# Altium PCB Digital.PcbDoc
Units mil, origin at the board's own origin, x right, y up, seen from the top; angles counter-clockwise.
Board outline 4470 x 2420 mil, 2 copper layers (Top Layer, Bottom Layer); 22 components, 58 nets, 187 pads, 9 vias.
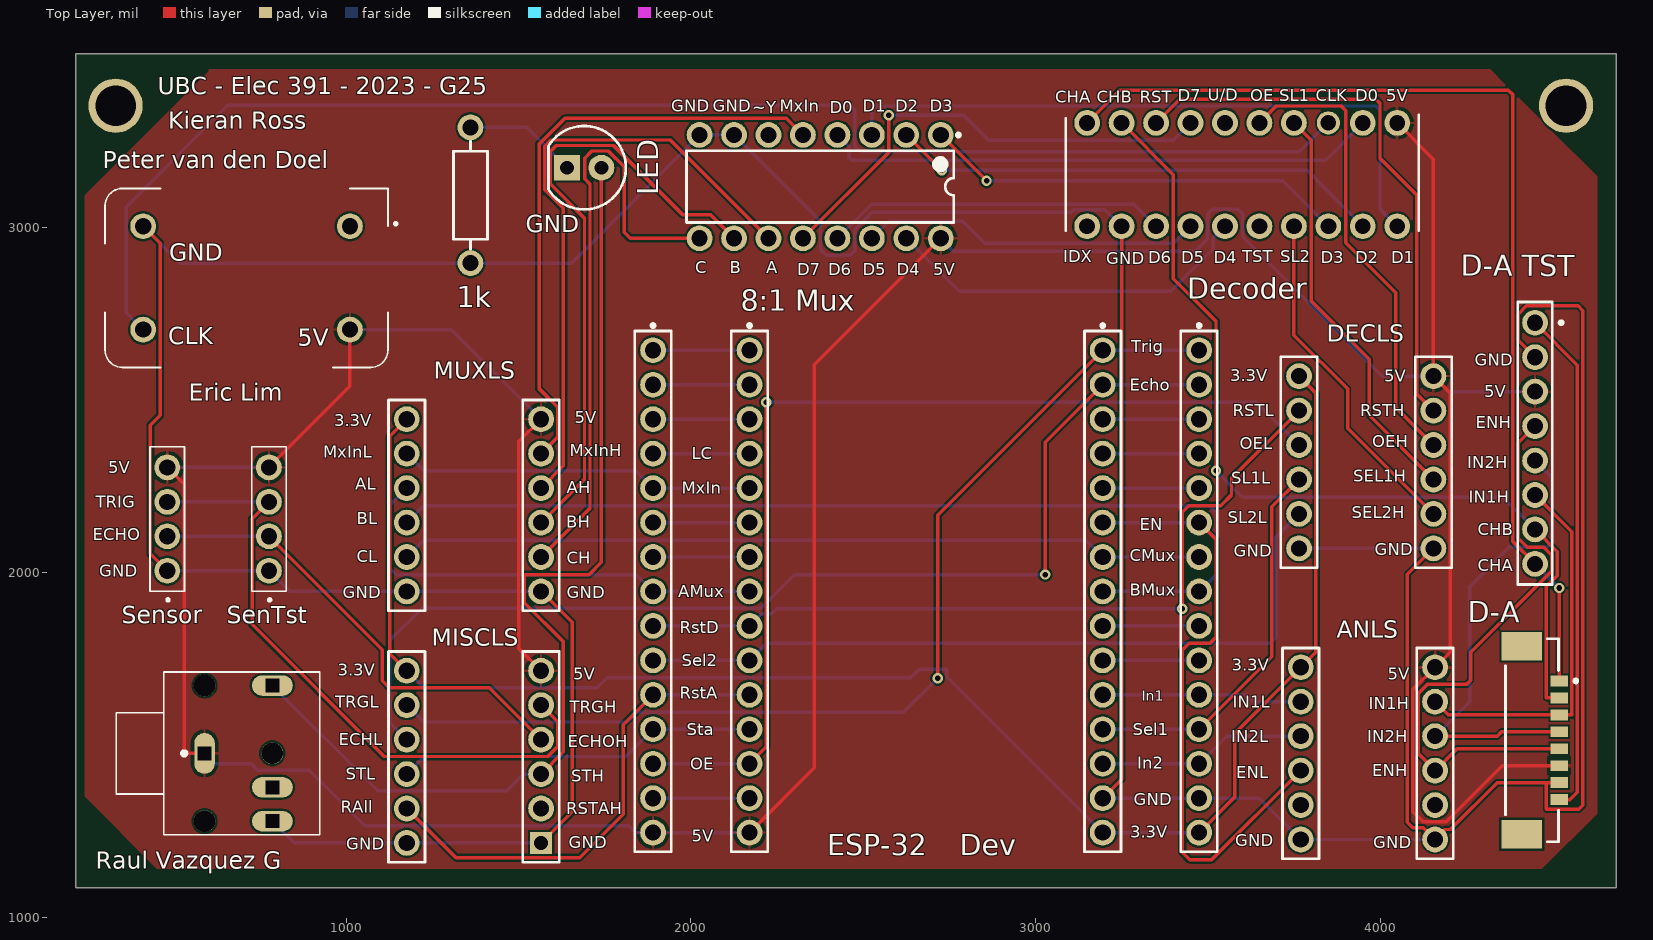
[diagram p0: Top Layer view]
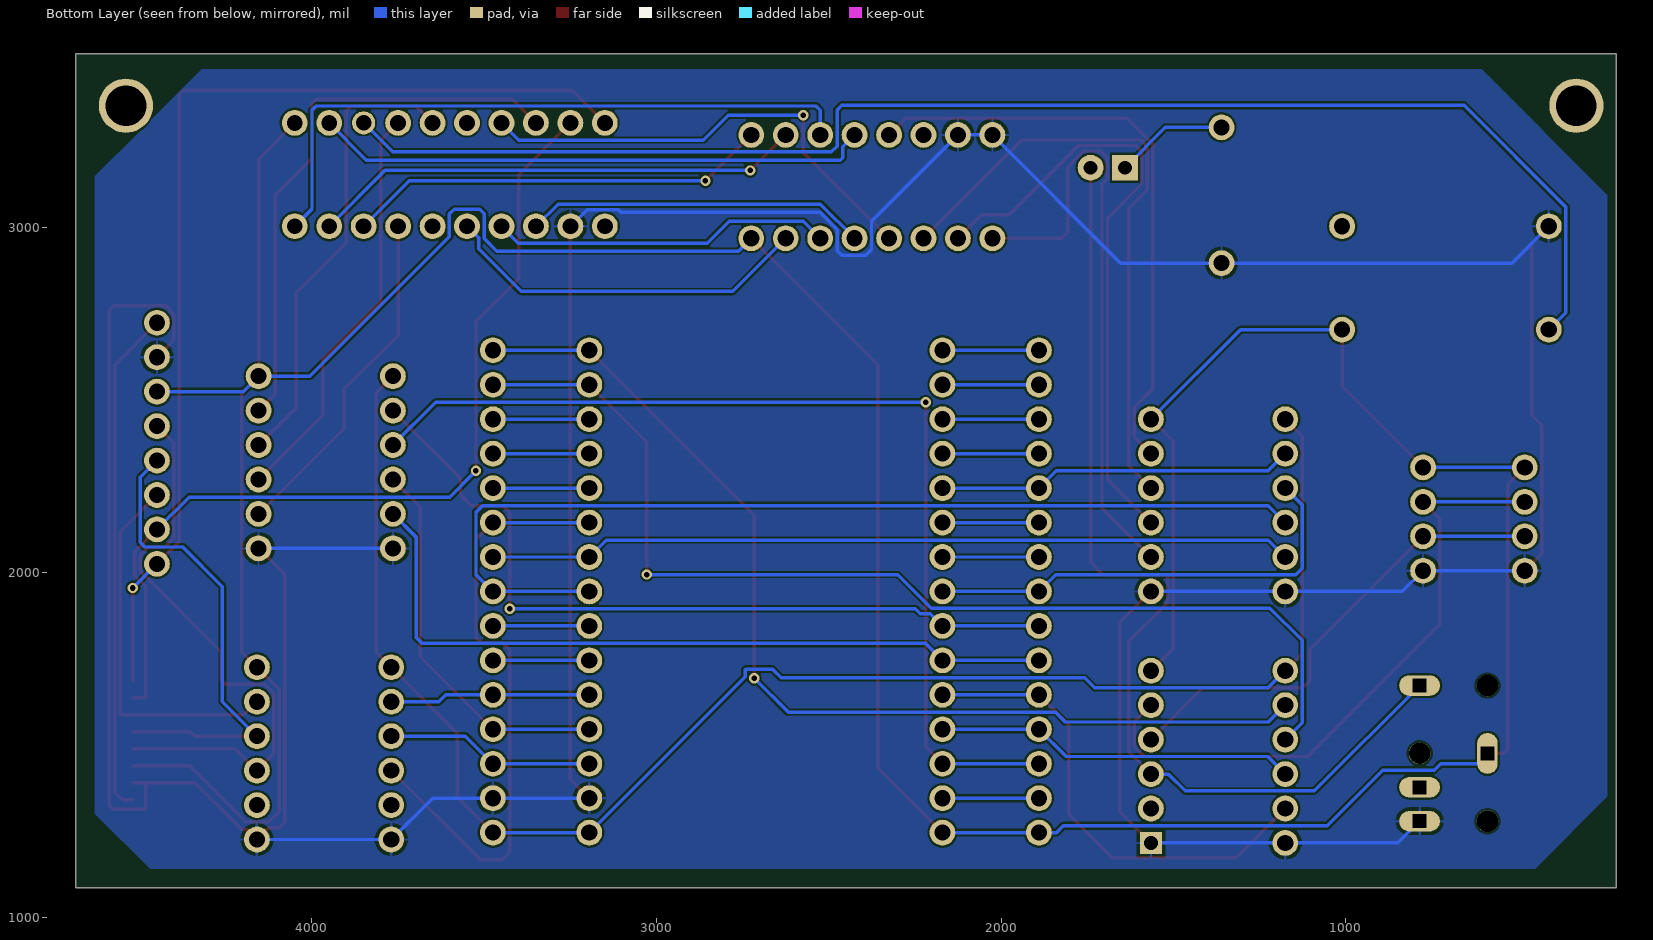
[diagram p1: Bottom Layer view, seen from below]
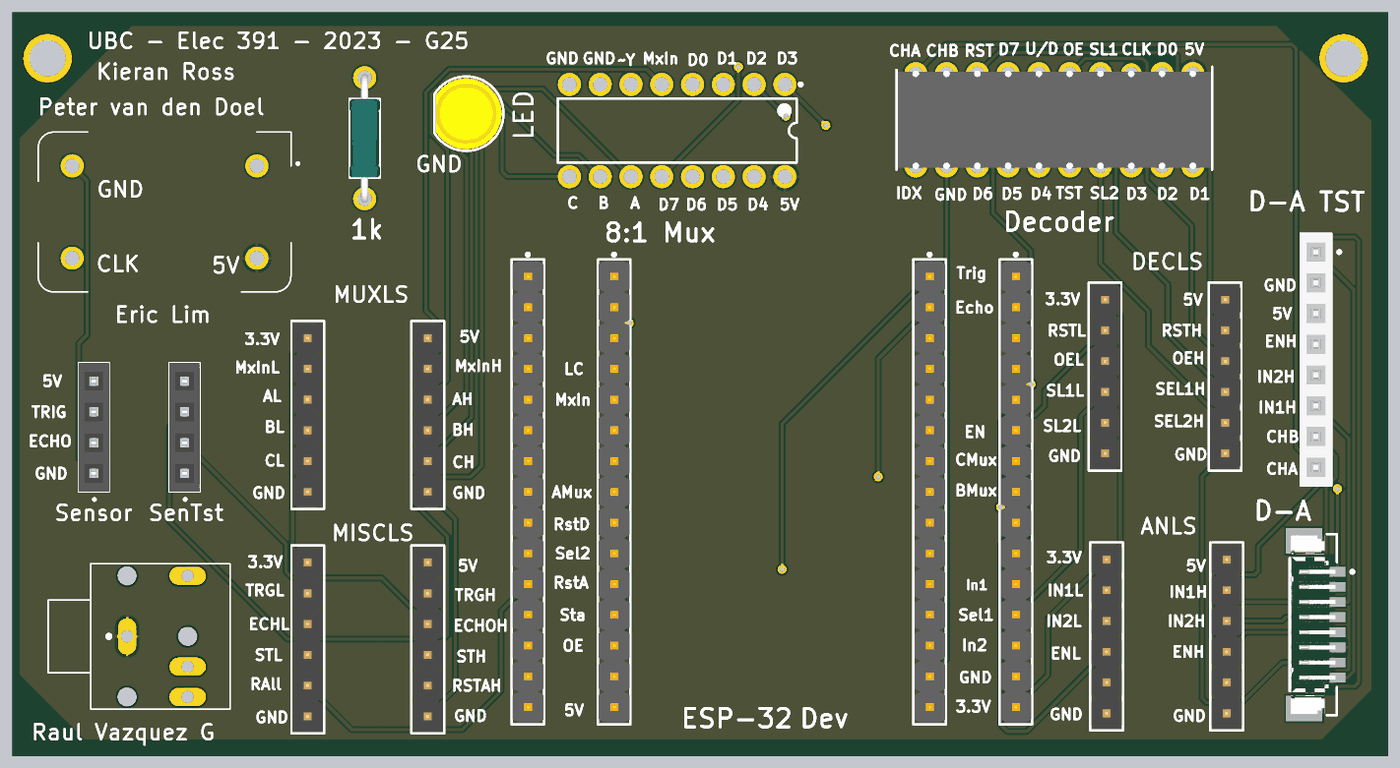
[diagram p2: 3D render of the assembled board from above, using the file's embedded part models]

## Layer stack, top to bottom
Top Solder: solder mask 0.4, Solder Resist, Dk 3.5
Top Layer: signal copper 1.4
Dielectric 1: dielectric 12.6, FR-4, Dk 4.8
Bottom Layer: signal copper 1.4
Bottom Solder: solder mask 0.4, Solder Resist, Dk 3.5

## Board outline
215,1085 4685,1085 4685,3505 215,3505

## Design rules (kind name [scope] priority, off if disabled: settings)
Clearance "Clearance~Sunstone Circuits" [All] p1: gap=6 ignorepadtopadclearanceinfootprint=FALSE except(0: Arc-Hole Track-Hole SMDPad-Hole THPad-Hole Via-Hole Fill-Hole Poly-Hole Region-Hole Text-Hole) // Sunstone Circuits Minimum Clearance Rule (Double Sided)
HoleSize "HoleSize~Sunstone Circuits" [All] p1: absolutevalues=TRUE maxlimit=251 minlimit=16 maxpercent=80.000 minpercent=20.000 // SSC Hole Size Rule For Single Sided & Double Sided Designs.
HoleSize Testpoint [All] p2: absolutevalues=TRUE maxlimit=100 minlimit=1 maxpercent=80.000 minpercent=20.000
HoleSize TestPointUsage [All] p3: absolutevalues=TRUE maxlimit=100 minlimit=1 maxpercent=80.000 minpercent=20.000
MinimumAnnularRing "MinimumAnnularRing~Sunstone Circuits" [All] p1: minimumring=7 // Sunstone Circuits Minimum Annular Ring (Double Sided)
PlaneClearance "PlaneClearance~Sunstone Circuits" [All] p1: clearance=12 // Sunstone Circuits Power Plane Clearance Rule (Double Sided)
PlaneConnect "PlaneConnect~Sunstone Circuits" [All] p1: planeconnectstyle=Relief reliefexpansion=10 reliefentries=4 reliefconductorwidth=8 reliefairgap=10 // Sunstone Circuits Power Plane Connect Rule (Double Sided)
PolygonConnect "PolygonConnect~Sunstone Circuits" [All] p1: connectstyle=Relief reliefconductorwidth=8 reliefentries=4 polygonreliefangle="90 Angle" airgapwidth=10 // Sunstone Circuits Polygon Connect Style (Double Sided)
RoutingVias "RoutingVias~Sunstone Circuits" [All] p1: holewidth=16 width=30 viastyle="Through Hole" minholewidth=16 minwidth=30 maxholewidth=20 maxwidth=40 // Sunstone Circuits Routing Vias Rule (Double Sided)
ShortCircuit "ShortCircuit~Sunstone Circuits" [All] p1: allowed=FALSE // Sunstone Circuits Short Circuit Rule~Do Not Allow (Double Sided)
SolderMaskExpansion "SolderMaskExpansion~Sunstone Circuits" [All] p1: expansion=3 istentingtop=FALSE // Sunstone Circuits Solder Mask Expansion Rule (Double Sided)
ViasUnderSMD "ViasUnderSMD~Sunstone Circuits" [All] p1: allowed=FALSE // Sunstone Circuits Vias Under SMD~Do Not Allow (Double Sided)
Width "Width~Sunstone Circuits" [All] p1: maxlimit=100 minlimit=6 preferedwidth=10 // Sunstone Circuits Minimum Width Rule (Double Sided)
26 further rules are at their usual default settings.

## Classes and differential pairs
component class pcb_schematic_digital: 1k "8:1 Mux" Decoder Dev ESP-32 LED "Ultasonic Sensor Conn Header"

## Components (designator, comment, footprint, x,y, rotation, side; value= is the part's Value field where it differs from the comment)
1k "MRS25000C1001FCT00" FP-MRS25-MFG 1360,3095 r90 top (schematic designator "1k res")
"8:1 Mux" "SN74HC151N" N0016A 2375,3120 r270 top
"Audio Jack" "SJ1-3544N" CUI_SJ1-3544N 588.15,1475 r0 top
Crystal "ECS-100AX-100" OSC_ECS-100AX-100 710,2855 r180 top
D-A "53398-0871" FP-53398-0871-MFG 4441.26,1513.03 r90 top (schematic designator "Digital to Analog Conn Header")
"D-A TST" "PPPC081LFBN-RC" SLIN-PPPC081LFBN-RC_V 4450,2375 r270 top (schematic designator "Test Pin DAC")
Decoder "HCTL-2022" DIP762W56P254L2591H330Q20N 3600,3155 r270 top (schematic designator Encoder)
Dev "61301511121" FP-61301511121-MFG 3195,1945 r270 top (schematic designator "ESP RIGHT TEST")
"ESP LEFT HEADER" "61301511121" FP-61301511121-MFG 1890,1945 r270 top
"ESP RIGHT HEADER" "61301511121" FP-61301511121-MFG 3475,1945 r270 top
ESP-32 "61301511121" FP-61301511121-MFG 2170,1945 r270 top (schematic designator "ESP LEFT TEST")
LED "SSL-LX5093YD" FP-SSL-LX5093YD-MFG 1690,3175 r0 top (schematic designator diode)
LS1-H "61300611121" 61300611121#1 4160,1475 r90 top
LS1-L "61300611121" 61300611121#1 3770,1475 r270 top
LS2-H "61300611121" 61300611121#1 1565,2195 r90 top
LS2-L "61300611121" 61300611121#1 1175,2195 r270 top
LS3-H "61300611121" 61300611121#1 4155,2320 r90 top
LS3-L "61300611121" 61300611121#1 3765,2320 r270 top
LS4-H "61300611121" 61300611121#2 1565,1465 r90 top
LS4-L "61300611121" 61300611121#1 1175,1465 r270 top
"Test Pin Sensor" "PPTC041LFBN-RC" SULLINS_PPTC041LFBN-RC 480,2155.05 r90 top
"Ultrasonic Sensor Header" "PPTC041LFBN-RC" SULLINS_PPTC041LFBN-RC 775,2155.05 r90 top

## Footprints (in the part's own frame and the unit in brackets; to place one, negate y for a bottom-side part, rotate by r counter-clockwise, add the part's x,y. Pads: shape width x height; smd on the part's side, far side on the other; paste and mask are expansions set on the pad)
61300611121#1 [mm] "Pin Header, pitch 2.54 mm, THT, Vertical, single row, 6p"
  round 1.9 hole 1.194 paste-1000 mask+0: 1(-6.35,0) 2(-3.81,0) 3(-1.27,0) 4(1.27,0) 5(3.81,0) 6(6.35,0)
  silkscreen extent -7.77,-1.34 7.77,1.34, body extent -7.62,-1.27 7.62,1.27, height 8.57
61300611121#2 [mm] "Pin Header, pitch 2.54 mm, THT, Vertical, single row, 6p"
  rect 1.6x1.6 hole 1.016: 1(-6.35,0)
  round 1.9 hole 1.194 paste-1000 mask+0: 2(-3.81,0) 3(-1.27,0) 4(1.27,0) 5(3.81,0) 6(6.35,0)
  silkscreen extent -7.77,-1.34 7.77,1.34, body extent -7.62,-1.27 7.62,1.27, height 8.57
CUI_SJ1-3544N [mm]
  oval 1.508x3.016 hole 1 square: 1(0,0)
  oval 3.016x1.508 hole 1 square: 2(5,-5) 3(5,5) 4(5,-2.5)
  round 1.6 hole 1.6 unplated: ""(0,-5) ""(0,5) ""(5,0)
  silkscreen extent -6.5,-6 8.5,6
DIP762W56P254L2591H330Q20N [mm]
  round 1.9 hole 1.168 paste-1000 mask+0: 1(-3.81,11.43) 2(-3.81,8.89) 4(-3.81,3.81) 5(-3.81,1.27) 6(-3.81,-1.27) 7(-3.81,-3.81) 8(-3.81,-6.35) 9(-3.81,-8.89) 10(-3.81,-11.43) 11(3.81,-11.43) 12(3.81,-8.89) 13(3.81,-6.35) 14(3.81,-3.81) 15(3.81,-1.27) 16(3.81,1.27) 17(3.81,3.81) 18(3.81,6.35) 19(3.81,8.89) 20(3.81,11.43)
  round 1.7 hole 1.143 paste-1000 mask+0: 3(-3.81,6.35)
  silkscreen extent -4.39,-13.02 4.13,13.02, body extent -4.09,-12.95 4.09,12.95, height 2.31
FP-53398-0871-MFG [mm]
  rect 0.8x1.3 smd paste+0 mask+0: 1(4.375,-2) 2(3.125,-2) 3(1.875,-2) 4(0.625,-2) 5(-0.625,-2) 6(-1.875,-2) 7(-3.125,-2) 8(-4.375,-2)
  rect 2.1x3 smd paste+0 mask+0: 9(-6.925,0.75) 10(6.925,0.75)
  silkscreen extent -7.48,-3.35 7.48,1.95, body extent -8.08,-2.75 8.08,2.35, height 0.25
FP-61301511121-MFG [mm]
  round 1.9 hole 1.194 paste-1000 mask+0: 1(-17.78,0) 2(-15.24,0) 3(-12.7,0) 4(-10.16,0) 5(-7.62,0) 6(-5.08,0) 7(-2.54,0) 8(0,0) 9(2.54,0) 10(5.08,0) 11(7.62,0) 12(10.16,0) 13(12.7,0) 14(15.24,0) 15(17.78,0)
  silkscreen extent -19.72,-1.34 19.2,1.34, body extent -19.3,-1.45 19.3,1.45, height 0.25
FP-MRS25-MFG [mm]
  round 1.9 hole 1.194 paste-1000 mask+0: 1(-5,0) 2(5,0)
  silkscreen extent -3.97,-1.25 3.97,1.25, body extent -5.72,-1.35 5.72,1.35, height 0.25
FP-SSL-LX5093YD-MFG [mm]
  rect 1.9x1.9 hole 1.016 paste-1000 mask+0: 1(-1.27,0)
  round 1.9 hole 1.016 paste-1000 mask+0: 2(1.27,0)
  silkscreen extent -2.62,-3.07 3.07,3.07, body extent -3.17,-3.17 3.17,3.17, height 0.25
N0016A [mm] "DIP, 16-Leads, Body 19.7x6.6mm, Pitch 2.54mm"
  round 1.9 hole 1.194 paste-1000 mask+0: 1(-3.81,8.89) 2(-3.81,6.35) 3(-3.81,3.81) 4(-3.81,1.27) 5(-3.81,-1.27) 6(-3.81,-3.81) 7(-3.81,-6.35) 8(-3.81,-8.89) 9(3.81,-8.89) 10(3.81,-6.35) 11(3.81,-3.81) 12(3.81,-1.27) 13(3.81,1.27) 14(3.81,3.81) 15(3.81,6.35) 16(3.81,8.89)
  silkscreen extent -3.93,-9.85 2.65,10.32, body extent -3.95,-9.85 3.95,9.85, height 5.08
OSC_ECS-100AX-100 [mm]
  round 1.9 hole 1.194 paste-1000 mask+0: 1(-7.62,-3.81) 7(7.62,-3.81) 8(7.62,3.81) 14(-7.62,3.81)
  silkscreen extent -11.1,-6.6 10.43,6.6
SLIN-PPPC081LFBN-RC_V [mm] "THD, 8-Leads, Body 20.82x2.54mm, Pitch 2.54mm"
  round 1.9 hole 1.194 paste-1000 mask+0: 1(-8.89,0) 2(-6.35,0) 3(-3.81,0) 4(-1.27,0) 5(1.27,0) 6(3.81,0) 7(6.35,0) 8(8.89,0)
  silkscreen extent -10.41,-1.27 10.41,2.05, body extent -10.41,-1.27 10.41,1.27, height 8.5
SULLINS_PPTC041LFBN-RC [mm]
  round 1.9 hole 1.194 paste-1000 mask+0: 1(-3.81,0) 2(-1.27,0) 3(1.27,0) 4(3.81,0)
  silkscreen extent -6.06,-1.27 5.33,1.27, body extent -5.33,-1.27 5.33,1.27, height 8.51

## Part data
1k: library part CMP-02408-000051-1, "RES 1K OHM 0.6W 1% AXIAL", Case/Package=Axial, Max Operating Temperature=155°C, Max Power Dissipation=600mW, Min Operating Temperature=-55°C, Package Quantity=5000, Resistance=1kR, Resistance Tolerance=1%, Resistor Type="Metal Film", Temperature Coefficient=50ppm/°C, Voltage Rating=350V, Construction=Cylindrical, Contact Plating=Tin, Diameter=2.5mm, Lead Diameter=0.6mm, Lead Free="Lead Free", Length=6.5mm, Military Standard=Not, Mount="Through Hole", Number of Pins=2, Number of Terminations=2, Packaging="Tape and Reel", Power Rating=600mW, Radiation Hardening=No, RoHS Compliant=Yes, Series=MRS25, Technology="THIN FILM", Termination=Axial, Tolerance=1%, Voltage Rating (DC)=350V, Weight=0.00776oz, Width=2.5mm
"8:1 Mux": library part CMP-1628-00023-2, "8-Line To 1-Line Data Selectors/Multiplexers, N0016A, TUBE", F @ Nom Voltage(Max)(Mhz)=28, Generic Part Number=SN74HC151, ICC @ Nom Voltage(Max)(mA)=0.08, Manufacturer="Texas Instruments", Operating Temperature Range(C)="-40 to 85", Rating=Catalog, tpd @ Nom Voltage(Max)(ns)=63, Voltage(Nom)(V)=3.3,5, Bits(#)=8, Channels(#)=1, Code_JEDEC=MS-001, Configuration=8：1, DatasheetVersion=SCLS110E, Function=Encoder/Multiplexer, Input Type=LVTTL/CMOS, Output Drive (IOL/IOH)(Max)(mA)=7.8/-7.8, Output Type=CMOS, PackageReference=N0016A, Schmitt Trigger=No, Technology Family=HC, Type=Standard, VCC(Max)(V)=6, VCC(Min)(V)=2
"Audio Jack": "3.5 mm Right-Angle Stereo Jack, 4 Pin PCB Mount, Non-Threaded", Package=None, Availability=Unavailable, MP=SJ1-3544N, Price=None
Crystal: "Oscillator  14-DIP, 4 Leads (Full Size, Metal Can)", Package=None, Availability=Unavailable, MP=ECS-100AX-100, Price=None
D-A: library part CMP-04776-000009-1, "CONN HEADER SMD 8POS 1.25MM", Ambient Temperature Range High=+105°C, Ambient Temperature Range Low=-40°C, Current Rating=1A, Manufacturer=Molex, Package=0, Temperature="-40°C to +105°C", Voltage Rating=125V, Automotive=No, Category=Conn, ComponentLink2Description=Datasheet, ComponentLink2URL=https://www.molex.com/pdm_docs/ps/PS-51021-024-001.pdf, Conn Gender=Male, Conn Orientation=Vertical, Contact Material=Tin,Nickel, Device Class L1=Connectors, Device Class L2="Headers and Wire Housings", Device Class L3=unset, Digikey Description="CONN HEADER SMD 8POS 1.25MM", Footprint Url=https://www.molex.com/pdm_docs/sd/533980871_sd.pdf, Height=4.9mm, Lead Free=Yes, Manufacturer Part Number=53398-0871, Mouser Description="Headers & Wire Housings VERTICAL HDR SMT 8P", Number Of Contacts=8, Number Of Rows=1, Octopart=https://octopart.com/53398-0871-molex-655298, Pitch=1.25mm, RoHS=TRUE, Standoff Height=0.05mm, Temperature Range High=+105°C, Temperature Range Low=-40°C
"D-A TST": library part CMP-1770-00002-1, "Female Header, Pitch 2.54 mm, 1 x 8 Position, Height 8.5 mm, Tail Length 3.2 mm, -40 to 105 degC, RoHS, Bulk", Case\Package=TO-252-3, Input Capacitance="350 pF", Max Operating Temperature="150 degC", Max Power Dissipation="2.5 W", Min Operating Temperature="-55 degC", Package Quantity=2500, ComponentLink1Description=Datasheet, ComponentLink1URL=http://sullinscorp.com/catalogs/101_PAGE114-115_.100_FEMALE_HDR.pdf, DatasheetVersion=Jan-15, Elements=1, Height="2.39 mm", Length="6.73 mm", Mount="Surface Mount", PackageDescription="Female Header, Pitch 2.54 mm, 1 x 8 Position, Height 8.5 mm, Tail Length 3.2 mm", PackageReference=PPPC081LFBN-RC, Packaging="Tape and Reel", Pins=3, Radiation Hardening=No, Rds On Max="115 mohm", REACH SVHC="No SVHC", RoHSCompliant=true, Typical Rise Time="90 ns", Width="6.22 mm"
Decoder: "HCTL-2022 quadrature decoder/counter ic Avago Technologies HCTL-2022 Decoder, 20-Pin PDIP", Manufacturer_Name="Avago Technologies", Mouser Part Number=630-HCTL-2022, Datasheet Link=https://datasheet.datasheetarchive.com/originals/distributors/Datasheets-2/DSA-25498.pdf, Geometry.Height=3.302mm, Manufacturer_Part_Number=HCTL-2022, Mouser Price/Stock=https://www.mouser.com/Search/Refine.aspx?Keyword=630-HCTL-2022
Dev "ESP LEFT HEADER" "ESP RIGHT HEADER" ESP-32: library part CMP-207987-000006-1, "CONN HEADER VERT 15POS 2.54MM", Color=Black, Flammability Rating="UL94 V-0", Max Operating Temperature=105°C, Min Operating Temperature=-40°C, Voltage Rating=250V, Connector Type=Header, Contact Finish - Mating=GOLD, Contact Material="Copper Alloy", Contact Mating Length=0.236inch, Contact Plating=Gold, Contact Shape=Square, Contact Type="Male Pin", Fastening Type=Pull, Gender=Male, Insulation Color=Black, Insulation Material=Nylon, Mount="Through Hole", Number Of Contacts=15, Number of Positions=15, Number Of Rows=1, Packaging=Bulk, Pitch=0.1inch, RoHS Compliant=Yes, Series=WR-PHD, Termination=Solder
LED: library part CMP-57192-000007-1, "LED YELLOW DIFFUSED T-1 3/4 T/H", Case/Package=Radial, Color=Yellow, Forward Current=20mA, Forward Voltage=2.1V, Max Operating Temperature=85°C, Min Operating Temperature=-40°C, Package Quantity=1000, Diameter=5mm, Dominant Wavelength=568nm, Height=8.6mm, Illumination Color=Yellow, Lead Free="Lead Free", Length=0.5inch, Lens Color=Yellow, Lens Style=Dome, Lens Transparency=Diffused, Luminous Intensity=30mcd, Mount="Through Hole", Number of LEDs=1, Number of Pins=2, Packaging=Bulk, REACH SVHC="No SVHC", RoHS Compliant=Yes, Series=-, Test Current=20mA, Viewing Angle=60°, Wavelength=585nm, Weight=0.01lb, Width=1.5inch
LS1-H LS1-L LS2-H LS2-L LS3-H LS3-L LS4-H LS4-L: library part CMP-1502-01070-1, "THT Vertical Pin Header WR-PHD, Pitch 2.54 mm, Single Row, 6 pins", Contact Resistance=20mOhm, Manufacturer="Wurth Elektronik", Operating Temperature=-40to105degC, Rated Current=3A, Withstanding Voltage=500VAC, Working Voltage=250VAC, Datasheet URL=https://katalog.we-online.de/em/datasheet/6130xx11121.pdf, Gender=Male, Manufacturer URL=http://www.we-online.de, Mounting Technology=THT, Orientation=Vertical, Package Reference=61300611121, Packaging=Bag, Part Number=61300611121, Pin Number=6, Pitch=2.54mm, Publisher=WurthElektronik, Row Number=Single
"Test Pin Sensor" "Ultrasonic Sensor Header": "4 Position Header Connector 0.100 (2.54mm) Through Hole Tin", Package=None, Check_prices=https://www.snapeda.com/parts/PPTC041LFBN-RC/Sullins+Connector+Solutions/view-part/?ref=eda, Digi-Key_Part_Number=S7002-ND, MF="Sullins Connector", MP=PPTC041LFBN-RC, Purchase-URL=https://pricing.snapeda.com/search/part/PPTC041LFBN-RC/?ref=eda, SnapEDA_Link=https://www.snapeda.com/parts/PPTC041LFBN-RC/Sullins+Connector+Solutions/view-part/?ref=snap

## Free pads (board coordinates)
  round 157.48 hole 118.11: 15(330,3355) 15(4540,3355)

## Via types
v1: diameter 30, hole 16, Top Layer to Bottom Layer, 9 vias

## Nets (pads, with @x,y where several pads share a name; then routed paths per layer and width w, separated by ;. In a path a pad name is that pad's centre, name@x,y a point inside that pad or via, vN(x,y) a via of type N, cw(c..) or ccw(c..) an arc to the next point about the centre after c; other vN are vias at no path point)
3-3V: "ESP RIGHT HEADER.15" Dev.15 LS1-L.1 LS2-L.1 LS3-L.1 LS4-L.1 | length 4807.6
  Top Layer w10: LS4-L.1 1126,1764 1126,2396 LS2-L.1 ; 3475,1245 3579,1349 3579,1534 LS1-L.1 3814,1769 3814,2521 LS3-L.1
  Bottom Layer w10: LS4-L.1 1225,1665 1728,1665 1757,1694 2638.13,1694 2663.22,1719.09 2741.12,1719.09 2742.2,1718 2742.2,1697.8 Dev.15 3475,1245
5V: "8:1 Mux.16" "Audio Jack.1" "D-A TST.3" "ESP LEFT HEADER.15" "Test Pin Sensor.4" "Ultrasonic Sensor Header.4" Crystal.14 D-A.6 Decoder.1 ESP-32.15 LS1-H.6 LS2-H.6 LS3-H.6 LS4-H.6 | length 11492.7
  Top Layer w10: 480,2305.05 529,2256.05 529,1487.5 541.5,1475 588.15,1475 ; 775,2305.05 1010,2540.05 Crystal.14 ; LS4-H.6 1500.6,1779.4 1500.6,2380.6 LS2-H.6 ; ESP-32.15 2358,1433 2358,2603 2725,2970 ; Decoder.1 4155,3200 LS3-H.6 4204,2521 4204,1769 LS1-H.6 4095.6,1660.6 4095.6,1305.4 4125,1276 4192,1276 4355.21,1439.21 D-A.6
  Bottom Layer w10: 480,2305.05 775,2305.05 ; 588.15,1475 588.15,1445 724,1445 743,1426 892,1426 1053,1265 1819,1265 1839,1245 1890,1245 ESP-32.15 ; Crystal.14 1305,2705 LS2-H.6 ; 2725,2970 2762,2933 3463.5,2933 3500,2969.5 3500,3041.5 3512.5,3054 3587.5,3054 3601,3040.5 3601,2975 4006,2570 LS3-H.6 4200,2525 4450,2525
"A Mux-H": "8:1 Mux.11" LS2-H.4 | length 1816.5
  Top Layer w10: LS2-H.4 1629.4,2309.4 1629.4,3056.79 1575.6,3110.6 1575.6,3237.5 1593.5,3255.4 1939.6,3255.4 2225,2970
"A Mux-L": "ESP LEFT HEADER.8" ESP-32.8 LS2-L.3 | length 1324.8
  Bottom Layer w10: LS2-L.3 1126,2196 1126,2012.5 1144.5,1994 1841,1994 1890,1945 ESP-32.8
"B Mux-H": "8:1 Mux.10" LS2-H.3 | length 1822.6
  Top Layer w10: LS2-H.3 1691,2271 1691,3028.6 1591.6,3128 1591.6,3222 1609,3239.4 1775.09,3239.4 1975.5,3039 2056,3039 2125,2970
"B Mux-L": "ESP RIGHT HEADER.8" Dev.8 LS2-L.4 | length 2907.5
  Bottom Layer w10: LS2-L.4 1224,2194 3505,2194 3524,2175 3524,1994 3475,1945 Dev.8
"C Mux-H": "8:1 Mux.9" LS2-H.2 | length 1781
  Top Layer w10: LS2-H.2 1707,2187 1707,3127 1691.6,3142.4 1691.6,3202.5 1712.5,3223.4 1760.05,3223.4 1805.9,3177.55 1805.9,2987.5 1823.4,2970 2025,2970
"C Mux-L": "ESP RIGHT HEADER.7" Dev.7 LS2-L.5 | length 2340.6
  Bottom Layer w10: LS2-L.5 1224,2094 3146,2094 Dev.7 3475,2045
CHA: "D-A TST.8" D-A.1 Decoder.10 | length 3037.7
  Top Layer w10: Decoder.10 3245,3400 4372.5,3400 4385,3387.5 4385,2090 4450,2025 ; D-A.1 v1(4520,1955)
  Bottom Layer w10: 4450,2025 v1(4520,1955)
CHB: "D-A TST.7" D-A.2 Decoder.9 | length 2684.9
  Top Layer w10: Decoder.9 3400,3155 3400,2853 3524,2729 v1(3524,2295) ; 4450,2125 4514.4,2060.6 4514.4,1990.91 4483,1959.51 4483,1637.06 4484,1636.06 D-A.2
  Bottom Layer w10: v1(3524,2295) 3600,2219 4356,2219 4450,2125
"CLK Crystal": Crystal.8 Decoder.3 | length 4139.7
  Bottom Layer w10: Crystal.8 361,2754 361,3061 656,3356 2462.5,3356 2476,3342.5 2476,3237.5 2492.5,3221 3766,3221 Decoder.3
D0: "8:1 Mux.4" Decoder.2 | length 1618.5
  Bottom Layer w10: 2425,3270 2459.16,3235.84 2459.16,3204.16 2466.32,3197 3842,3197 Decoder.2
D1: "8:1 Mux.3" Decoder.20 | length 1914.1
  Bottom Layer w10: 2525,3270 2525,3341.5 2537.5,3354 3987.5,3354 4000,3341.5 4000,3055 Decoder.20
D2: "8:1 Mux.2" Decoder.19 | length 1434.8
  Top Layer w10: 2625,3270 v1(2728,3167)
  Bottom Layer w10: v1(2728,3167) 3788,3167 Decoder.19
D3: "8:1 Mux.1" Decoder.18 | length 1234.8
  Top Layer w10: 2725,3270 v1(2858,3137)
  Bottom Layer w10: v1(2858,3137) 3718,3137 Decoder.18
D4: "8:1 Mux.15" Decoder.15 | length 1085.8
  Bottom Layer w10: 2625,2970 2779,2816 3392.95,2816 3516.11,2939.16 3516.11,2971.11 Decoder.15
D5: "8:1 Mux.14" Decoder.14 | length 991.7
  Bottom Layer w10: 2525,2970 2574,3019 2789.4,3019 2852.4,2956 3401,2956 Decoder.14
D6: "8:1 Mux.13" Decoder.13 | length 992.8
  Bottom Layer w10: 2425,2970 2524.4,3069.4 3285.6,3069.4 Decoder.13
D7: "8:1 Mux.12" Decoder.7 | length 1386.7
  Top Layer w10: 2325,2970 2574,3219 v1(2574,3327)
  Bottom Layer w10: v1(2574,3327) 2792,3327 2864,3255 3400,3255 Decoder.7
ECHO-H: "Test Pin Sensor.2" "Ultrasonic Sensor Header.2" LS4-H.4 | length 1382.2
  Top Layer w10: 775,2105.05 1104,1776.05 1104,1686 1125,1665 1415,1665 LS4-H.4
  Bottom Layer w10: 480,2105.05 775,2105.05
ECHO-L: "ESP RIGHT HEADER.2" Dev.2 LS4-L.3 | length 3189.6
  Top Layer w10: v1(3028,1994) 3028,2378 Dev.2
  Bottom Layer w10: LS4-L.3 1126,1564 1126,1803 1219.6,1896.6 2202.5,1896.6 2299.9,1994 v1(3028,1994) ; Dev.2 3475,2545
EN-H: "D-A TST.4" D-A.5 LS1-H.3 | length 1721.7
  Top Layer w10: 4450,2425 4401,2376 4401,2100 4427.6,2073.4 4475,2073.4 4498.4,2050 4498.4,2004.4 4263,1769 4263,1687.5 4250.5,1675 4136.6,1675 4111.6,1650 4111.6,1473.4 LS1-H.3 4223.43,1488.43 D-A.5
EN-L: "ESP RIGHT HEADER.6" Dev.6 LS1-L.4 | length 1794
  Top Layer w10: 3475,2145 3524,2096 3524,1812.5 3506.5,1795 3446,1795 3426,1775 3426,1187.5 3447.5,1166 3511,1166 LS1-L.4
  Bottom Layer w10: Dev.6 3475,2145
GROUND: 1k.1 "8:1 Mux.7" "8:1 Mux.8" "Audio Jack.2" "D-A TST.2" "ESP RIGHT HEADER.14" "Test Pin Sensor.1" "Ultrasonic Sensor Header.1" Crystal.7 D-A.7 Decoder.12 Dev.14 LS1-H.1 LS1-L.6 LS2-H.1 LS2-L.6 LS3-H.1 LS3-L.6 LS4-H.1 LS4-L.6 | length 13529.9
  Top Layer w10: Crystal.7 459,2956 459,2456 431,2428 431,2054.05 480,2005.05 ; LS4-H.1 1655,1305 1655,1855 LS2-H.1 ; Dev.14 3250,1400 Decoder.12 ; LS3-H.1 4079.6,1994.6 4079.6,1275.16 4095.6,1259.16 4125.84,1259.16 LS1-H.1 4189,1254 4204,1254 4340,1390 4484,1390 ; 4450,2625 4401,2674 4401,2750 4425,2774 4575,2774 4589,2760 4589,1325 4576.5,1312.5 4484,1312.5 4483,1313.5 4483,1389 4484,1390 ; D-A.7 4484,1390
  Bottom Layer w10: Crystal.7 516.85,2898.15 1k.1 1653.15,2898.15 2025,3270 2125,3270 2376,3019 2376,2937.5 2392.5,2921 2462.5,2921 2475,2933.5 2475,2995 2525,3045 3102,3045 3110.4,3053.4 3201.6,3053.4 Decoder.12 ; 480,2005.05 775,2005.05 835.05,1945 LS2-L.6 LS2-H.1 ; 785,1278.15 848.15,1215 LS4-L.6 LS4-H.1 ; Dev.14 3475,1345 3650,1345 LS1-L.6 LS1-H.1 ; LS3-L.6 LS3-H.1
IN1-H: "D-A TST.6" D-A.3 LS1-H.5 | length 1094.7
  Top Layer w10: LS1-H.5 4198.15,1586.85 D-A.3 4556,1586.85 4557,1587.85 4557,2118 4450,2225
IN1-L: "ESP RIGHT HEADER.11" Dev.11 LS1-L.2 | length 583.3
  Bottom Layer w10: Dev.11 3475,1645 3612,1645 3632,1625 LS1-L.2
IN2-H: "D-A TST.5" D-A.4 LS1-H.4 | length 1390.7
  Top Layer w10: LS1-H.4 4340,1525 4352.64,1537.64 D-A.4
  Bottom Layer w10: LS1-H.4 4260,1625 4260,1959 4375,2074 4485.5,2074 4499,2087.5 4499,2276 4450,2325
IN2-L: "ESP RIGHT HEADER.13" Dev.13 LS1-L.3 | length 608.1
  Bottom Layer w10: Dev.13 3475,1445 3555,1525 LS1-L.3
"LOAD CELL": "ESP LEFT HEADER.4" ESP-32.4 | length 280
  Bottom Layer w10: 1890,2345 ESP-32.4
MuxIn-H: "8:1 Mux.5" LS2-H.5 | length 1758.7
  Top Layer w10: LS2-H.5 1613.4,2393.4 1613.4,2479.6 1559,2534 1559,3243.53 1634.47,3319 2276,3319 2325,3270
MuxIn-L: "ESP LEFT HEADER.5" ESP-32.5 LS2-L.2 | length 1036.4
  Bottom Layer w10: LS2-L.2 1225,2295 1840,2295 1890,2245 ESP-32.5
"Net1k res_2": 1k.2 LED.1 | length 328.4
  Bottom Layer w10: 1k.2 1523.15,3291.85 LED.1
"NetDigital to Analog Conn Header_8": "D-A TST.1" D-A.8 | length 1475.4
  Top Layer w10: 4450,2725 4573,2602 4573,1362.5 4551.29,1340.79 D-A.8
"NetESP LEFT HEADER_1": "ESP LEFT HEADER.1" ESP-32.1 | length 280
  Bottom Layer w10: 1890,2645 ESP-32.1
"NetESP LEFT HEADER_2": "ESP LEFT HEADER.2" ESP-32.2 | length 280
  Bottom Layer w10: 1890,2545 ESP-32.2
"NetESP LEFT HEADER_3": "ESP LEFT HEADER.3" ESP-32.3 | length 280
  Bottom Layer w10: 1890,2445 ESP-32.3
"NetESP LEFT HEADER_6": "ESP LEFT HEADER.6" ESP-32.6 | length 280
  Bottom Layer w10: 1890,2145 ESP-32.6
"NetESP LEFT HEADER_7": "ESP LEFT HEADER.7" ESP-32.7 | length 280
  Bottom Layer w10: 1890,2045 ESP-32.7
"NetESP LEFT HEADER_14": "ESP LEFT HEADER.14" ESP-32.14 | length 280
  Bottom Layer w10: 1890,1345 ESP-32.14
"NetESP RIGHT HEADER_3": "ESP RIGHT HEADER.3" Dev.3 | length 280
  Bottom Layer w10: Dev.3 3475,2445
"NetESP RIGHT HEADER_4": "ESP RIGHT HEADER.4" Dev.4 | length 280
  Bottom Layer w10: Dev.4 3475,2345
"NetESP RIGHT HEADER_5": "ESP RIGHT HEADER.5" Dev.5 | length 280
  Bottom Layer w10: Dev.5 3475,2245
"NetESP RIGHT HEADER_9": "ESP RIGHT HEADER.9" Dev.9 | length 280
  Bottom Layer w10: Dev.9 3475,1845
"NetESP RIGHT HEADER_10": "ESP RIGHT HEADER.10" Dev.10 | length 280
  Bottom Layer w10: Dev.10 3475,1745
OE-H: Decoder.5 LS3-H.4 | length 1352.6
  Top Layer w10: Decoder.5 3699,3354 3887.5,3354 3901,3340.5 3901,2957 4046,2812 4046,2479 LS3-H.4
OE-L: "ESP LEFT HEADER.13" ESP-32.13 LS3-L.3 | length 2946.7
  Top Layer w10: ESP-32.13 2219,1494 v1(2219,2494)
  Bottom Layer w10: 1890,1445 ESP-32.13 ; v1(2219,2494) 3641,2494 LS3-L.3
"RST ALL-H": LS4-H.2
"RST ALL-L": "ESP LEFT HEADER.11" ESP-32.11 LS4-L.5 | length 1402.5
  Top Layer w10: LS4-L.5 1318,1172 1677,1172 1803,1298 1803,1558 1890,1645
  Bottom Layer w10: 1890,1645 ESP-32.11
RST-H: Decoder.8 LS3-H.5 | length 1639.8
  Top Layer w10: Decoder.8 3419,3374 3988,3374 4000,3362 4000,3202 4106,3096 4106,2519 LS3-H.5
RST-L: "ESP LEFT HEADER.9" ESP-32.9 LS3-L.2 | length 2326.6
  Top Layer w10: v1(3426,1895) 3426,2175 3445,2194 3538,2194 3569,2225 3569,2274 LS3-L.2
  Bottom Layer w10: 1890,1845 ESP-32.9 2205.6,1880.6 2234.4,1880.6 2248.8,1895 v1(3426,1895)
SEL1-H: Decoder.4 LS3-H.3 | length 1202.8
  Top Layer w10: Decoder.4 3800,3255 3800,2788 3969,2619 3969,2456 LS3-H.3
SEL1-L: "ESP RIGHT HEADER.12" Dev.12 LS3-L.4 | length 1125.1
  Top Layer w10: 3475,1545 3686,1756 3686,2191 LS3-L.4
  Bottom Layer w10: Dev.12 3475,1545
SEL2-H: Decoder.17 LS3-H.2 | length 1002.8
  Top Layer w10: Decoder.17 3750,2689 3906,2533 3906,2419 LS3-H.2
SEL2-L: "ESP LEFT HEADER.10" ESP-32.10 LS3-L.5 | length 2221.2
  Bottom Layer w10: 1890,1745 ESP-32.10 2219,1794 3679.5,1794 3698,1812.5 3698,2103 LS3-L.5
STATE-H: "Audio Jack.3" LED.2 LS4-H.3 | length 2961.5
  Top Layer w10: LS4-H.3 1629.4,1479.4 1629.4,1799.7 1516.6,1912.5 1516.6,1992 1518.6,1994 1704,1994 1740,2030 LED.2
  Bottom Layer w10: 785,1671.85 1090.85,1366 1465,1366 1514,1415 LS4-H.3
STATE-L: "ESP LEFT HEADER.12" ESP-32.12 LS4-L.4 | length 1048.8
  Bottom Layer w10: LS4-L.4 1226,1466 1811,1466 1890,1545 ESP-32.12
TRIG-H: "Test Pin Sensor.3" "Ultrasonic Sensor Header.3" LS4-H.5 | length 1869.2
  Top Layer w10: 775,2205.05 726,2156.05 726,1849.5 1109.5,1466 1584.45,1466 1613.4,1494.95 1613.4,1566.6 LS4-H.5
  Bottom Layer w10: 480,2205.05 775,2205.05
TRIG-L: "ESP RIGHT HEADER.1" Dev.1 LS4-L.2 | length 3044.3
  Top Layer w10: v1(2716,1693) 2716,2166 Dev.1
  Bottom Layer w10: LS4-L.2 1224,1566 1814,1566 1843,1595 2618,1595 v1(2716,1693) ; Dev.1 3475,2645
pads on no net: "8:1 Mux.6" "Audio Jack.4" "Audio Jack." Crystal.1 D-A.9 D-A.10 Decoder.6 Decoder.11 Decoder.16 LS1-H.2 LS1-L.5

## Polygon pours and split planes (outlines as drawn)
GROUND on Bottom Layer "GROUND_L02_P001" (solid, pour order 1): 4470,1140 4630,1300 4630,3150 4320,3460 605,3460 240,3095 240,1350 450,1140
5V on Top Layer "5V_L01_P000" (solid, pour order 0): 4470,1140 4630,1300 4630,3150 4320,3460 600,3460 600,3455 240,3095 240,1350 450,1140

## Silkscreen, mask and mechanical layers (free items; w line width, h text height)
Top Overlay:
  text "UBC - Elec 391 - 2023 - G25" at 453,3388 h50
  text "U/D" at 3500,3370 h35
  text "D7" at 3413,3368 h35
  text "OE" at 3623,3368 h35
  text "SL1" at 3708,3368 h35
  text "CLK" at 3813,3368 h35
  text "D0" at 3928,3368 h35
  text "5V" at 4018,3368 h35
  text "CHA" at 3058,3363 h35
  text "CHB" at 3178,3363 h35
  text "RST" at 3303,3363 h35
  text "GND" at 1943,3338 h35
  text "GND" at 2063,3338 h35
  text "MxIn" at 2258,3338 h35
  text "D1" at 2498,3338 h35
  text "D2" at 2593,3338 h35
  text "D3" at 2693,3338 h35
  text "~Y" at 2178,3333 h35
  text "D0" at 2403,3333 h35
  text "Kieran Ross" at 483,3288 h50
  text "Peter van den Doel" at 293,3173 h50
  text "GND" at 1519.89,2987.06 h50
  text "GND" at 485,2905 h50
  text "IDX" at 3080,2900 h35
  text "TST" at 3600,2900 h35
  text "SL2" at 3710,2900 h35
  text "D6" at 3328,2898 h35
  text "D5" at 3423,2898 h35
  text "D4" at 3518,2898 h35
  text "D3" at 3828,2898 h35
  text "D2" at 3928,2898 h35
  text "D1" at 4033,2898 h35
  text "GND" at 3205,2895 h35
  text "C" at 2013,2868 h35
  text "B" at 2113,2868 h35
  text "A" at 2218,2868 h35
  text "D7" at 2308,2863 h35
  text "D6" at 2398,2863 h35
  text "D5" at 2498,2863 h35
  text "D4" at 2598,2863 h35
  text "5V" at 2703,2863 h35
  text "DECLS" at 3845,2670 h50
  text "CLK" at 483,2663 h50
  text "5V" at 858,2658 h50
  text "Trig" at 3278,2639.66 h35
  text "GND" at 4275,2600 h35
  text "MUXLS" at 1253,2563 h50
  text "3.3V" at 3565,2555 h35
  text "5V" at 4013,2553 h35
  text "Echo" at 3273,2528 h35
  text "5V" at 4303,2508 h35
  text "Eric Lim" at 543,2498 h50
  text "RSTL" at 3573,2453 h35
  text "RSTH" at 3943,2453 h35
  text "5V" at 1663,2433 h35
  text "3.3V" at 965,2425 h35
  text "ENH" at 4278,2418 h35
  text "OEH" at 3978,2363 h35
  text "OEL" at 3593,2358 h35
  text "MxInH" at 1648,2338 h35
  text "MxInL" at 933,2333 h35
  text "LC" at 2003,2328 h35
  text "IN2H" at 4253,2303 h35
  text "5V" at 308,2288 h35
  text "SEL1H" at 3923,2263 h35
  text "SL1L" at 3568,2258 h35
  text "AL" at 1025,2240 h35
  text "AH" at 1640,2230 h35
  text "MxIn" at 1973,2228 h35
  text "IN1H" at 4258,2203 h35
  text "TRIG" at 273,2188 h35
  text "SEL2H" at 3918,2158 h35
  text "SL2L" at 3558,2143 h35
  text "BL" at 1030,2140 h35
  text "BH" at 1638.55,2130.54 h35
  text "EN" at 3303,2123 h35
  text "CHB" at 4283,2108 h35
  text "ECHO" at 263,2093 h35
  text "GND" at 3985,2050 h35
  text "GND" at 3575,2045 h35
  text "CMux" at 3273,2033 h35
  text "CL" at 1030,2030 h35
  text "CH" at 1640,2025 h35
  text "CHA" at 4283,2003 h35
  text "GND" at 283,1988 h35
  text "BMux" at 3273,1933 h35
  text "AMux" at 1963,1928 h35
  text "GND" at 990,1925 h35
  text "GND" at 1640,1925 h35
  text "Sensor" at 348,1853 h50
  text "SenTst" at 653,1853 h50
  text "RstD" at 1968,1823 h35
  text "ANLS" at 3875,1810 h50
  text "MISCLS" at 1248,1788 h50
  text "Sel2" at 1973,1728 h35
  text "3.3V" at 3570,1715 h35
  text "3.3V" at 975,1700 h35
  text "5V" at 1658,1688 h35
  text "5V" at 4023,1688 h35
  text "RstA" at 1968,1633 h35
  text "In1" at 3308,1628 h30
  text "TRGL" at 968,1608 h35
  text "IN1L" at 3573,1608 h35
  text "IN1H" at 3968,1603 h35
  text "TRGH" at 1648,1593 h35
  text "Sta" at 1988,1528 h35
  text "Sel1" at 3283,1528 h35
  text "IN2L" at 3568,1508 h35
  text "IN2H" at 3963,1508 h35
  text "ECHL" at 978,1498 h35
  text "ECHOH" at 1643,1493 h35
  text "In2" at 3295,1430 h35
  text "OE" at 1998,1428 h35
  text "ENH" at 3978,1408 h35
  text "ENL" at 3583,1403 h35
  text "STL" at 998,1398 h35
  text "STH" at 1653,1393 h35
  text "GND" at 3285,1325 h35
  text "RAll" at 983,1303 h35
  text "RSTAH" at 1638,1298 h35
  text "3.3V" at 3275,1230 h35
  text "5V" at 2003,1218 h35
  text "GND" at 3580,1205 h35
  text "GND" at 1645,1200 h35
  text "GND" at 3980,1200 h35
  text "GND" at 1000,1195 h35
  text "Raul Vazquez G" at 273,1139.66 h50
Mechanical 1:
  lines w10: 220,1095 260,1095 4623.75,1095 4675,1095 4675,3495 220,3495 220,1095